# Altium PCB Rx_pcb.PcbDoc (part 2 of 2)
Units mm, origin at the board's own origin, x right, y up, seen from the top; angles counter-clockwise.
Board outline 77.98 x 77.98 mm, 4 copper layers (Top Layer, MidLayer1, MidLayer2, Bottom Layer); 173 components, 127 nets, 641 pads, 155 vias.
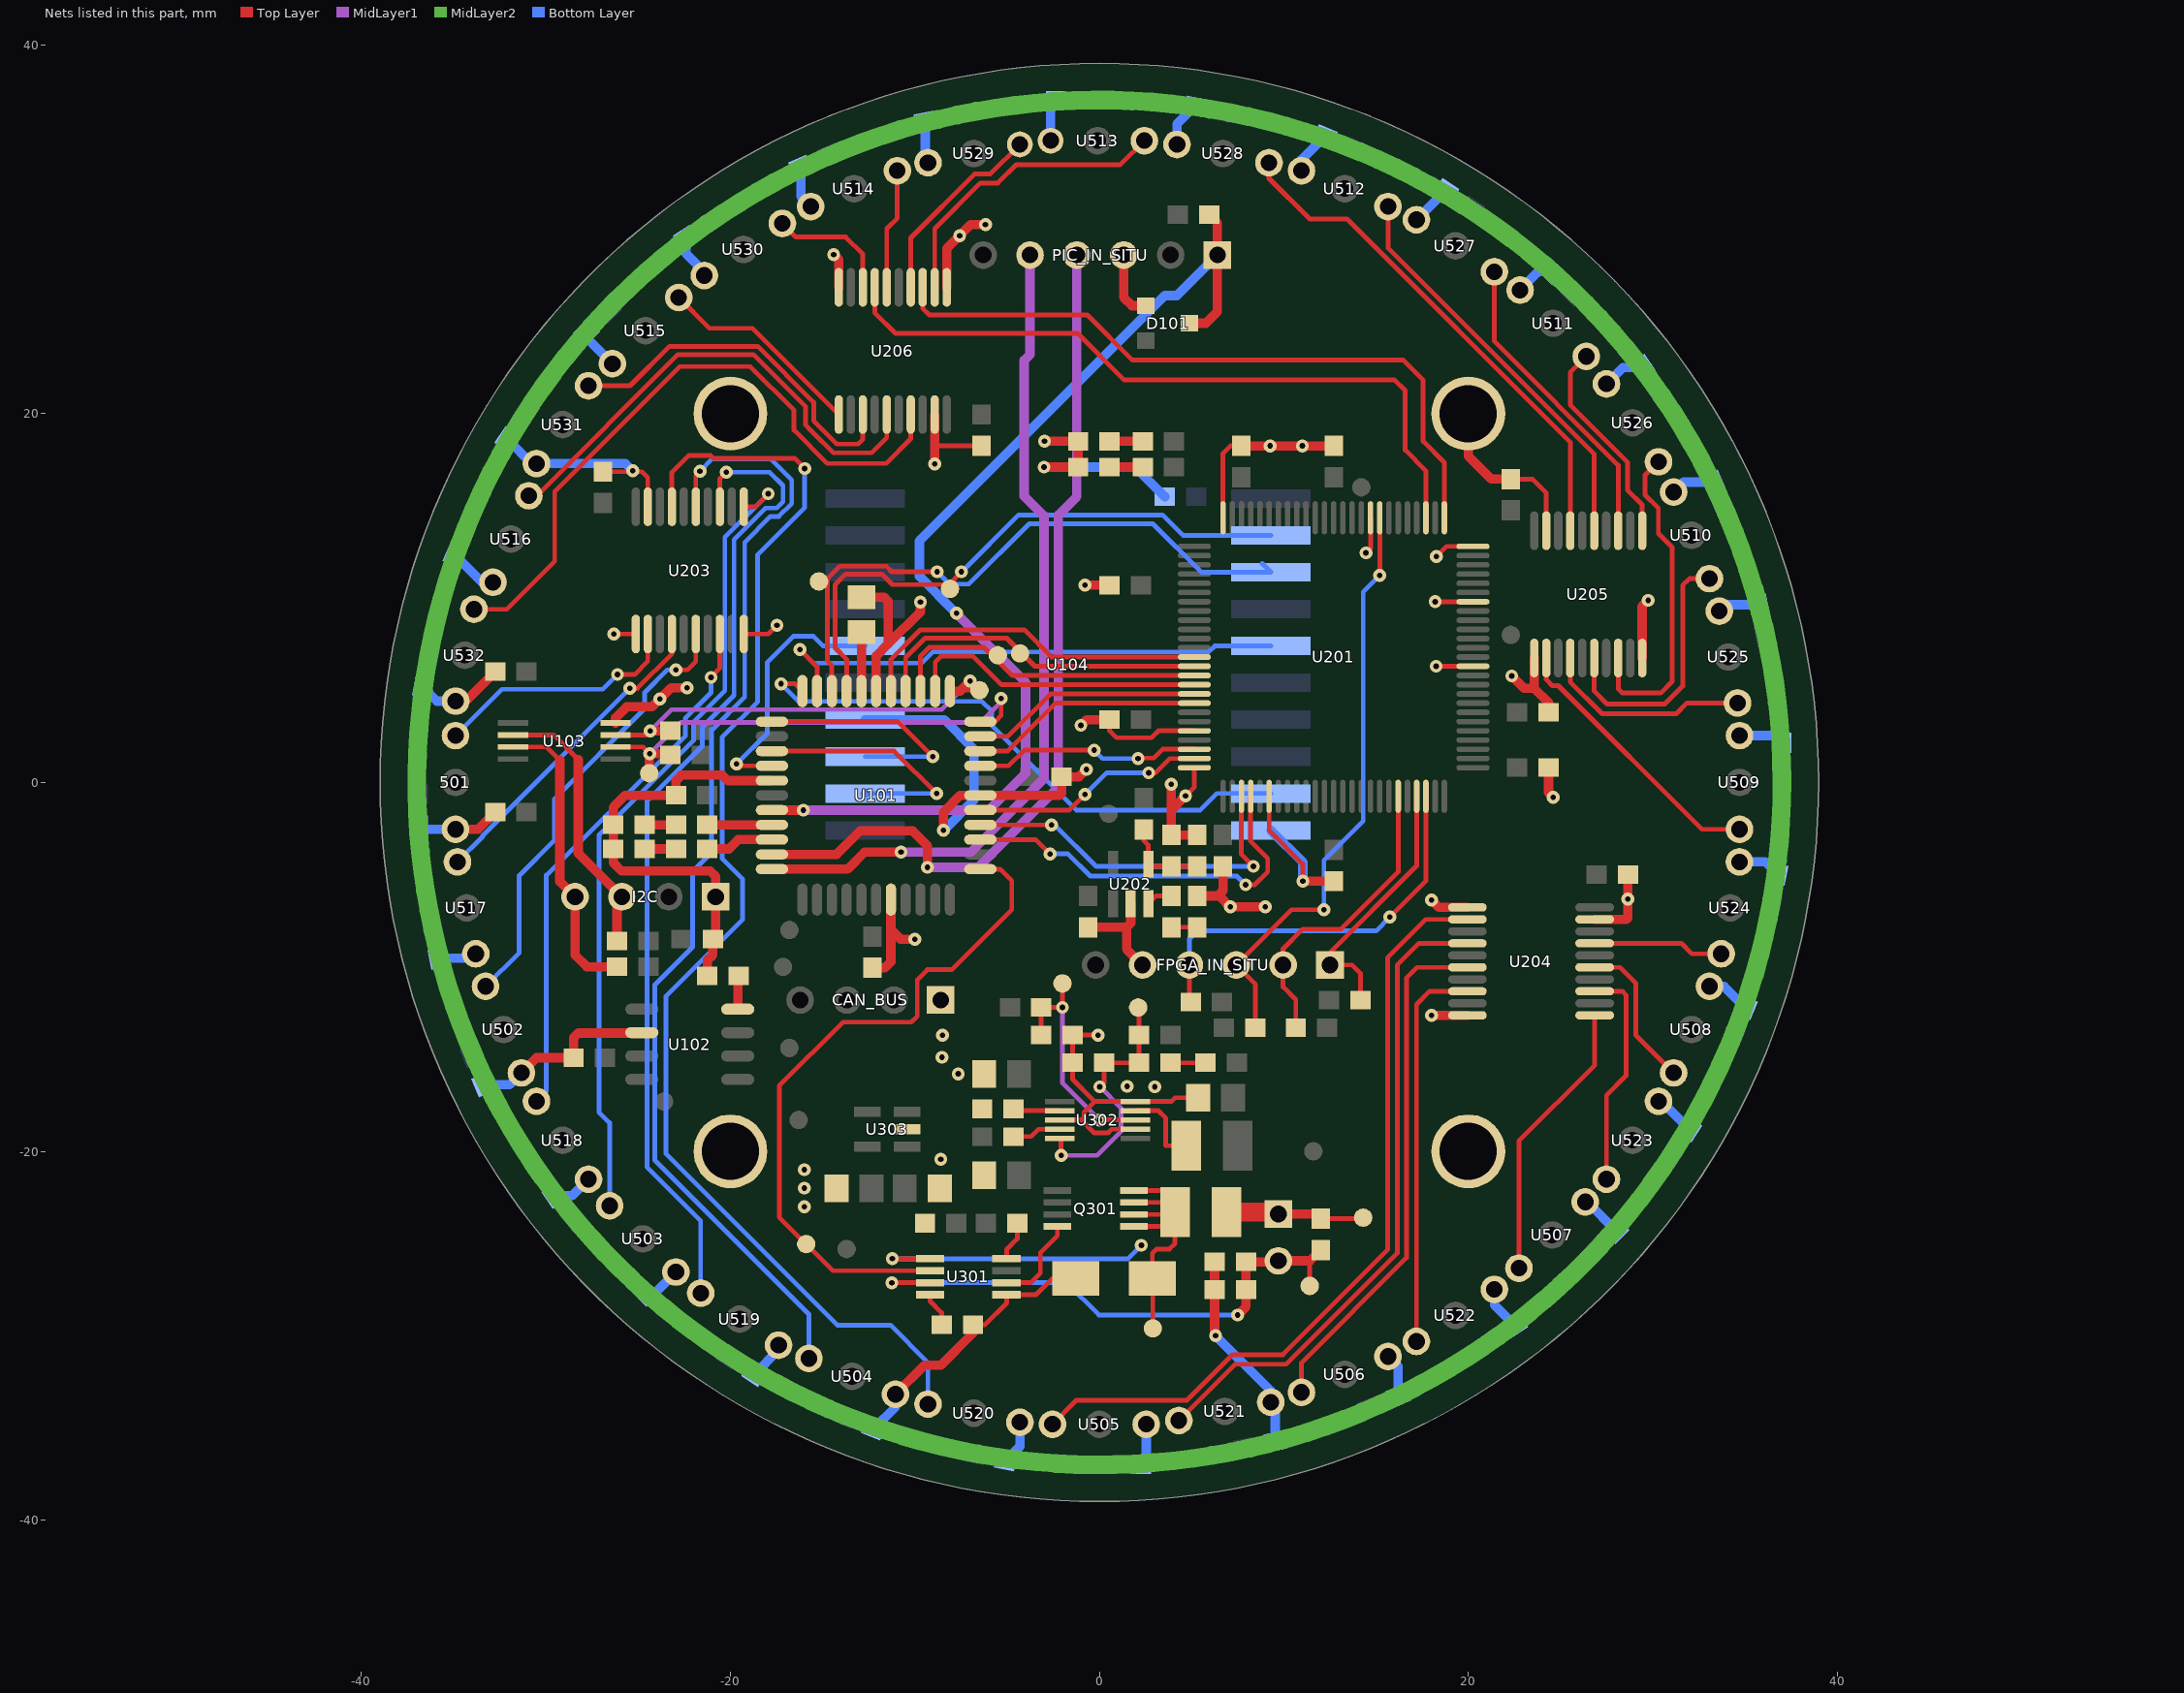
[diagram p4: the nets of this part, all layers, seen from the top]

## Via types
v1: diameter 0.7, hole 0.3, Top Layer to Bottom Layer, 155 vias

## Nets (pads, with @x,y where several pads share a name; then routed paths per layer and width w, separated by ;. In a path a pad name is that pad's centre, name@x,y a point inside that pad or via, vN(x,y) a via of type N, cw(c..) or ccw(c..) an arc to the next point about the centre after c; other vN are vias at no path point) (continued)
FPGA_TSOP40_15: U201.78 U206.7 | length 39.2
  Top Layer w0.254: U206.7@-12.175,26.85 -12.175,25.475 -11.05,24.35 -1.175,24.35 1.35,21.825 16,21.825 16.575,21.25 16.575,18.025 17.7,16.9 U201.78@17.7,14.35
FPGA_TSOP40_16: U201.76 U206.3 | length 37.8
  Top Layer w0.254: U206.3@-9.575,26.85 -9.575,25.7 -9.225,25.35 -0.65,25.35 1.8,22.9 16.475,22.9 17.55,21.825 17.55,18.5 18.7,17.35 U201.76@18.7,14.35
GND: 501.3 C101.2 C102.1 C103.1 C104.1 C105.1 C106.2 C107.1 C108.1 C109.2 C201.2 C202.2 C203.2 C204.2 C205.2 C206.1 C207.1 C208.1 C209.1 C210.1 C211.1 C212.1 C213.1 C214.1 C301.1 C302.1 C304.1 C305.1 C306.1 C307.1 C309.1 C310.1 C501.2 C502.2 C503.2 C504.2 C505.2 C506.2 C507.2 C508.2 C509.2 C510.2 C511.2 C512.2 C513.2 C514.2 C515.2 C516.2 C517.2 C518.2 C519.2 C520.2 C521.2 C522.2 C523.2 C524.2 C525.2 C526.2 C527.2 C528.2 C529.2 C530.2 C531.2 C532.2 CAN_BUS.1 D101.1 D301.1 FPGA_IN_SITU.5 I2C.1 pad.0 pad.1 pad.2 pad.3 PIC_IN_SITU.3 R102.1 R107.2 R108.2 R205.1 R208.1 R209.2 R210.2 R301.1 R303.1 R304.1 R309.1 U101.6 U101.16 U101.29 U101.39 U102.2 U103.4 U104.10 U104.14 U201.21 U201.25 U201.31 U201.62 U201.69 U201.75 U201.84 U201.100 U202.2 U203.1 U203.10 U203.19 U204.1 U204.10 U204.19 U205.1 U205.10 U205.19 U206.1 U206.10 U206.19 U301.5 U302.3 U302.7 U302.10 U303.2 U502.3 U503.3 U504.3 U505.3 U506.3 U507.3 U508.3 U509.3 U510.3 U511.3 U512.3 U513.3 U514.3 U515.3 U516.3 U517.3 U518.3 U519.3 U520.3 U521.3 U522.3 U523.3 U524.3 U525.3 U526.3 U527.3 U528.3 U529.3 U530.3 U531.3 U532.3 | length 548.3
  Top Layer w0.254: C201.2@-26.7,16.85 -24.8,16.85 -24.475,16.525 U203.19@-24.475,14.95 ; v1(-26.325,8.05) U203.1@-25.125,8.05 ; C107.1@-20.95,-8.5 C107.1@-20.8,-8.35 ; U203.10@-19.275,8.05 -17.95,8.05 v1(-17.475,8.525) ; -8.925,18.5 -8.675,18.25 C204.2@-6.4,18.25 ; R301.1@-6.85,-29.4 -6.2,-29.4 -5.025,-28.225 U301.5@-5.025,-27.775 -3.425,-27.775 -2.55,-26.9 D301.1@-1.275,-26.9 ; U302.3@-2.15,-18.3 -0.975,-18.3 ; R309.1@-1.45,-15.2 -1.45,-16.1 -0.25,-17.3 ; R309.1@-1.45,-15.2 C306.1@-1.45,-13.7 v1(-0.075,-13.7) ; C207.1@0.55,3.4 0.55,2.8 0.925,2.425 2.825,2.425 ; U302.7@1.95,-18.8 0.675,-18.8 0.475,-19 -0.275,-19 -0.975,-18.3 ; 2.919,2.519 2.825,2.425 ; 3.106,2.706 3.2,2.8 ; 3.9,-1.525 3.9,-1.5 ; v1(4.675,-0.725) 5.15,-0.25 U201.25@5.15,0.8 ; U201.21@5.15,2.8 3.2,2.8 ; C309.1@5.35,-17.1 4.1,-17.1 3.9,-17.3 U302.10@1.95,-17.3 -0.25,-17.3 ; v1@6.25,-29.95 v1(6.3,-30) ; 6.425,-6.15 6.5,-6.15 ; U201.100@6.7,14.35 6.7,17.85 7.1,18.25 C211.1@7.7,18.25 ; U201.31@9.2,-0.75 9.2,-2.6 11.025,-4.425 v1(11.025,-5.35) ; v1(14.45,12.45) 14.7,12.7 U201.84@14.7,14.35 ; v1(18.2,9.8) U201.69@20.25,9.8 ; v1(18.25,6.3) U201.62@20.25,6.3 ; v1(18.275,12.25) 18.825,12.8 U201.75@20.25,12.8 ; C203.2@22.3,16.45 23.475,16.45 24.225,15.7 U205.19@24.225,13.65 ; -0.975,-18.3 -0.825,-18.15 -0.825,-17.875 -0.25,-17.3 ; 2.825,2.425 3.2,2.8
  Top Layer w0.508: 501.3@-34.9,-2.54 -33.69,-2.54 C106.2@-32.75,-1.6 ; U532.3@-34.896,4.409 -34.341,4.409 C108.1@-32.75,6 ; U502.3@-31.328,-15.747 -30.506,-14.925 C101.2@-28.5,-14.925 -28.5,-13.85 -28.24,-13.59 U102.2@-24.75,-13.59 ; U103.4@-26.225,3.225 -26.225,3.5 -25.62,4.105 -24.245,4.105 v1(-23.825,4.525) -23.225,5.125 v1(-22.35,5.125) ; R102.1@-21.25,-10.5 -21.25,-9.65 -20.95,-9.35 C107.1@-20.95,-8.5 ; C107.1@-20.8,-8.35 I2C.1@-20.8,-6.2 -20.8,-5.1 -21.1,-4.8 -25.9,-4.8 -26.35,-4.35 R108.2@-26.35,-3.6 R107.2@-26.35,-2.3 -26.35,-1.35 -25.7,-0.7 C105.1@-22.95,-0.7 -22.95,0.1 -22.65,0.4 -20.45,0.4 -20.15,0.1 U101.16@-17.75,0.1 ; v1(-14.4,28.625) -14.125,28.35 U206.10@-14.125,26.85 ; C102.1@-12.9,10.05 -11.675,10.05 -11.45,9.825 -11.45,7.5 ; C103.1@-12.4,-10.05 C103.1@-12.3,-10.05 -11.625,-10.05 -11.3,-9.725 -11.3,-7.976 ; U101.6@-12.1,4.95 -12.1,6.85 -11.45,7.5 ; U101.29@-11.3,-6.35 -11.3,-7.976 ; U504.3@-11.053,-33.172 -9.481,-31.6 -8.6,-31.6 -6.85,-29.85 R301.1@-6.85,-29.4 ; v1(-10,-8.5) -10.776,-8.5 -11.3,-7.976 ; v1(-9.7,9.775) -9.7,9.25 -11.45,7.5 ; v1(-8.925,17.275) -8.925,18.5 U206.19@-8.925,19.95 ; v1(-8.45,-2.6) -8.45,-1.6 -7.55,-0.7 U101.39@-6.45,-0.7 -2.15,-0.7 -2.05,-0.6 C104.1@-2.05,0.1 ; U206.1@-8.275,26.85 -8.275,28.95 v1(-7.575,29.65) -6.975,30.25 v1(-6.175,30.25) ; v1@-3.025,17.125 v1(-3,17.1) R209.2@-1.15,17.1 R210.2@-1.15,18.5 v1(-2.975,18.5) ; C104.1@-2.05,0.3 -1.1,0.3 v1(-0.7,0.7) ; v1(-1,3.1) -0.7,3.4 C207.1@0.55,3.4 ; v1(-0.775,10.7) C212.1@0.55,10.7 ; C205.2@-0.6,-7.85 1.475,-7.85 ; PIC_IN_SITU.3@1.32,28.6 1.32,26.305 1.775,25.85 D101.1@2.525,25.85 ; U202.2@1.7,-6.575 1.7,-7.625 1.475,-7.85 ; FPGA_IN_SITU.5@2.34,-9.9 1.475,-9.035 1.475,-7.85 ; 3.9,-1.5 v1(4.675,-0.725) ; v1(3.9,-0.1) C206.1@3.9,-2.85 R208.1@5.3,-2.85 ; R205.1@5.3,-6.15 6.425,-6.15 6.7,-5.875 C213.1@6.7,-4.55 ; v1@6.25,-29.95 R303.1@6.25,-27.5 R304.1@6.25,-26 ; 6.5,-6.15 v1(7.1,-6.75) v1(9,-6.75) ; C211.1@7.7,18.25 C210.1@12.7,18.25 ; v1(11.025,-5.35) C208.1@12.7,-5.35 ; v1(18,-12.625) U204.10@19.95,-12.625 ; v1(18,-6.375) 18.4,-6.775 U204.1@19.95,-6.775 ; pad.2@20,20 20,17.7 21.25,16.45 C203.2@22.3,16.45 ; v1(22.35,5.775) 23.025,5.1 23.575,5.1 ; U205.1@23.575,6.75 23.575,5.1 ; C209.1@24.35,0.8 24.35,-0.55 v1(24.6,-0.8) ; C214.1@24.35,3.8 24.35,4.325 23.575,5.1 ; U204.19@26.85,-7.425 28.575,-7.425 28.65,-7.35 C202.2@28.65,-5 ; U205.10@29.425,6.75 29.425,9.55 v1(29.75,9.875)
  MidLayer2 w1.016: 37,0 cw(c0,0) 37,0.099
  Bottom Layer w0.508: C501.2@-36.9,-2.35 -36.71,-2.54 501.3@-34.9,-2.54 ; C532.2@-36.666,5.166 -35.908,4.409 U532.3@-34.896,4.409 ; C517.2@-35.834,-9.534 -34.047,-9.534 U517.3@-33.804,-9.291 ; C516.2@-34.925,12.315 -33.464,10.853 U516.3@-32.872,10.853 ; C502.2@-33.375,-16.385 -31.967,-16.385 U502.3@-31.328,-15.747 ; C531.2@-32.072,18.593 -30.767,17.288 U531.3@-30.511,17.288 -25.688,17.288 v1(-25.3,16.9) ; C518.2@-29.528,-22.407 -28.584,-22.407 U518.3@-27.689,-21.512 ; C515.2@-27.801,24.399 -27.801,24.109 U515.3@-26.396,22.704 ; C503.2@-24.599,-27.701 -24.109,-27.701 U503.3@-22.954,-26.546 ; C530.2@-22.407,29.528 -22.407,28.682 -21.412,27.687 U530.3@-21.412,27.489 ; C519.2@-18.693,-32.072 -17.388,-30.767 U519.3@-17.388,-30.511 ; C514.2@-16.185,33.375 -16.185,31.767 U514.3@-15.647,31.228 ; U104.14@-12.7,3.4 -8.4,3.4 -6.8,1.8 -6.8,-0.95 v1(-8.45,-2.6) ; C504.2@-12.215,-35.025 -11.053,-33.864 U504.3@-11.053,-33.172 ; C529.2@-9.434,35.834 -9.434,33.747 U529.3@-9.291,33.604 ; C520.2@-5.066,-36.766 -4.309,-36.008 U520.3@-4.309,-34.696 ; v1(-3,17.1) 1.95,17.1 C109.2@3.55,15.5 ; U513.3@-2.64,34.8 -2.64,36.71 C513.2@-2.35,37 ; C505.2@2.25,-37 2.54,-36.71 U505.3@2.54,-34.8 ; U528.3@4.209,34.596 4.209,35.708 C528.2@5.166,36.666 ; v1(6.3,-30) 9.291,-32.991 U521.3@9.291,-33.604 9.534,-33.847 C521.2@9.534,-35.734 ; U104.10@9.3,-2.6 11.025,-4.325 v1(11.025,-5.35) ; U512.3@10.953,33.172 10.953,33.764 C512.2@12.215,35.025 ; U506.3@15.647,-31.128 16.185,-31.667 C506.2@16.185,-33.275 ; U527.3@17.188,30.511 18.749,32.072 C527.2@18.793,32.072 ; U522.3@21.412,-27.489 21.412,-28.333 C522.2@22.507,-29.428 ; U511.3@22.804,26.696 23.809,27.701 C511.2@24.499,27.701 ; U507.3@26.337,-22.745 26.447,-22.745 C507.2@28.001,-24.299 ; U526.3@27.489,21.612 28.384,22.507 C526.2@29.428,22.507 ; U523.3@30.311,-17.288 30.467,-17.288 C523.2@31.972,-18.793 ; U510.3@31.128,15.747 31.667,16.285 C510.2@33.275,16.285 ; U508.3@33.072,-11.053 33.864,-11.053 C508.2@35.025,-12.215 ; U525.3@33.604,9.291 33.947,9.634 C525.2@35.734,9.634 ; U524.3@34.696,-4.309 36.108,-4.309 C524.2@36.766,-4.966 ; U509.3@34.7,2.54 36.61,2.54 C509.2@37,2.15
  other v1: -16,-23 -16,-22 -16,-21 -8.6,-20.425 3,-16.5 1.5,-16.475 -7.65,-15.8 -8.525,-14.9 -8.5,-13.7 28.65,-6.325 9.25,18.25 11,18.25
JTAG_TCK: FPGA_IN_SITU.4 R204.1 U201.48 | length 22.2
  Top Layer w0.254: FPGA_IN_SITU.4@4.88,-9.9 4.88,-11.83 R204.1@4.95,-11.9 ; v1(15.75,-7.3) 17.7,-5.35 U201.48@17.7,-0.75
  Bottom Layer w0.254: FPGA_IN_SITU.4@4.88,-9.9 4.88,-8.47 5.3,-8.05 15,-8.05 v1(15.75,-7.3)
JTAG_TDI: FPGA_IN_SITU.2 R202.1 U201.45 | length 16.6
  Top Layer w0.254: R202.1@10.65,-13.3 10.65,-11.775 9.96,-11.085 FPGA_IN_SITU.2@9.96,-9.9 9.96,-9.015 11.025,-7.95 13.1,-7.95 16.2,-4.85 U201.45@16.2,-0.75
JTAG_TDO: FPGA_IN_SITU.3 R203.1 U201.83 | length 32.3
  Top Layer w0.254: R203.1@8.45,-13.3 8.45,-10.93 FPGA_IN_SITU.3@7.42,-9.9 10.42,-6.9 v1(12.175,-6.9) ; v1(15.2,11.225) U201.83@15.2,14.35
  Bottom Layer w0.254: v1(12.175,-6.9) 12.175,-4.225 14.3,-2.1 14.3,10.325 v1(15.2,11.225)
JTAG_TMS: FPGA_IN_SITU.1 R201.1 U201.47 | length 14.5
  Top Layer w0.254: R201.1@14.15,-11.8 14.15,-10.35 13.7,-9.9 FPGA_IN_SITU.1@12.5,-9.9 12.302,-9.423 17.2,-4.525 U201.47@17.2,-0.75
NetC102_2: C102.2 U101.7 | length 3.2
  Top Layer w0.508: U101.7@-12.9,4.95 C102.2@-12.9,8.15
NetC206_2: C206.2 R207.1 R208.2 U202.4 | length 4.9
  Top Layer w0.254: R207.1@2.4,-2.35 2.4,-3.15 2.65,-3.4 U202.4@2.65,-4.425 2.775,-4.55 C206.2@3.9,-4.55 R208.2@5.3,-4.55
NetC303_1: C303.1 LED_VISION.2 PT17.1 R303.2 R304.2 U301.3 | length 30.3
  Top Layer w0.254: v1(-11.25,-27.125) U301.3@-9.175,-27.125 ; LED_VISION.2@9.64,-26 LED_VISION.2@9.7,-25.94 ; PT17.1@11.4,-27.3 11.4,-25.95 11.41,-25.94
  Top Layer w0.508: v1(7.5,-28.875) 7.95,-28.425 R303.2@7.95,-27.5 R304.2@7.95,-26 LED_VISION.2@9.64,-26 ; LED_VISION.2@9.7,-25.94 11.41,-25.94 C303.1@12,-25.35
  Bottom Layer w0.254: v1(-11.25,-27.125) -1.775,-27.125 -0.025,-28.875 v1(7.5,-28.875)
NetC303_2: C303.2 L301.2 LED_VISION.1 PT19.1 | length 7.6
  Top Layer w0.254: LED_VISION.1@9.6,-23.3 LED_VISION.1@9.7,-23.4 ; C303.2@11.75,-23.4 C303.2@12,-23.65 14.25,-23.65 PT19.1@14.3,-23.6
  Top Layer w0.508: LED_VISION.1@9.7,-23.4 C303.2@11.75,-23.4
  Top Layer w1.016: L301.2@6.9,-23.3 LED_VISION.1@9.6,-23.3
NetC306_2: C306.2 PT20.1 R305.1 U302.8 | length 12.8
  Top Layer w0.254: C306.2@-3.15,-13.7 R305.1@-3.15,-12.2 v1(-2,-12.2) PT20.1@-2,-10.9 ; v1(0,-18.3) U302.8@1.95,-18.3
  MidLayer1 w0.254: v1(-2,-12.2) -2,-16.3 v1(0,-18.3)
NetC307_2: C307.2 U302.2 | length 2.5
  Top Layer w0.254: C307.2@-4.65,-17.7 -4.55,-17.8 U302.2@-2.15,-17.8
NetC308_1: C308.1 PT23.1 R307.1 R309.2 U302.5 | length 14
  Top Layer w0.254: U302.5@-2.15,-19.3 -2.075,-19.375 v1(-2.075,-20.225) ; v1(0.025,-16.5) 0.25,-16.275 R309.2@0.25,-15.2 R307.1@2.15,-15.2 C308.1@2.15,-13.7 2.15,-12.25 PT23.1@2.1,-12.2
  MidLayer1 w0.254: v1(-2.075,-20.225) -0.125,-20.225 1.175,-18.925 1.175,-17.65 v1(0.025,-16.5)
NetD102_1: D102.1 U101.19 | length 3.5
  Top Layer w0.508: D102.1@-21.25,-2.3 U101.19@-17.75,-2.3
NetD102_2: D102.2 R107.1 | length 1.7
  Top Layer w0.508: R107.1@-24.65,-2.3 D102.2@-22.95,-2.3
NetD103_1: D103.1 U101.20 | length 3.7
  Top Layer w0.508: D103.1@-21.25,-3.6 -20.075,-3.6 -19.575,-3.1 U101.20@-17.75,-3.1
NetD103_2: D103.2 R108.1 | length 1.7
  Top Layer w0.508: R108.1@-24.65,-3.6 D103.2@-22.95,-3.6
NetD201_2: D201.2 R209.1 | length 1.8
  Top Layer w0.508: R209.1@0.55,17.1 D201.2@2.35,17.1
NetD202_2: D202.2 R210.1 | length 1.8
  Top Layer w0.508: R210.1@0.55,18.5 D202.2@2.35,18.5
NetL302_1: L302.1 U302.9 | length 4.4
  Top Layer w0.254: U302.9@1.95,-17.8 3.2,-17.8 3.6,-18.2 3.6,-19.7 L302.1@4.7,-19.7
NetQ301_4: Q301.4 U301.6 | length 5
  Top Layer w0.254: U301.6@-5.025,-27.125 -3.725,-27.125 -3.2,-26.6 -3.2,-25.5 -2.275,-24.575 Q301.4@-2.275,-24.075
NetR102_2: R102.2 U102.8 | length 1.8
  Top Layer w0.254: R102.2@-19.6,-10.55 R102.2@-19.55,-10.5
  Top Layer w0.508: U102.8@-19.6,-12.295 R102.2@-19.6,-10.55
NetR205_2: R205.2 R206.1 | length 1.4
  Top Layer w0.254: R206.1@3.9,-7.85 R205.2@5.3,-7.85
NetR206_2: R206.2 U202.3 | length 1.4
  Top Layer w0.254: U202.3@2.65,-6.575 3.075,-6.15 R206.2@3.9,-6.15
NetR301_2: R301.2 U301.4 | length 1.9
  Top Layer w0.254: U301.4@-9.175,-27.775 -9.175,-28.125 -8.55,-28.75 R301.2@-8.55,-29.4
NetR302_1: R302.1 U301.8 | length 2.2
  Top Layer w0.254: U301.8@-5.025,-25.825 -5.025,-25.325 -4.45,-24.75 R302.1@-4.45,-23.9
NetR306_1: R306.1 U302.4 | length 2.7
  Top Layer w0.254: R306.1@-4.65,-19.2 -3.7,-19.2 -3.3,-18.8 U302.4@-2.15,-18.8
NetR307_2: R307.2 R308.1 | length 1.9
  Top Layer w0.254: R307.2@3.85,-15.2 R308.1@5.75,-15.2
PIC_CPLD_PORT0: U101.5 U201.13 | length 19.4
  Top Layer w0.254: U101.5@-11.3,4.95 -11.3,6.675 -9.7,8.275 -4.075,8.275 -2.6,6.8 U201.13@5.15,6.8
PIC_CPLD_PORT1: PT11.1 U101.4 U201.14 | length 18.5
  Top Layer w0.254: U101.4@-10.5,4.95 -10.5,6.775 -9.45,7.825 -5.025,7.825 -3.5,6.3 U201.14@5.15,6.3
PIC_CPLD_PORT2: PT12.1 U101.3 U201.15 | length 17.6
  Top Layer w0.254: U101.3@-9.7,4.95 -9.7,6.85 -9.225,7.325 -6.25,7.325 -4.725,5.8 U201.15@5.15,5.8
PIC_CPLD_PORT3: U101.2 U201.16 | length 16.4
  Top Layer w0.254: U101.2@-8.9,4.95 -8.9,6.525 -8.575,6.85 -6.85,6.85 -5.3,5.3 U201.16@5.15,5.3
PIC_CPLD_PORT4: U101.43 U201.17 | length 12.6
  Top Layer w0.254: U101.43@-6.45,2.5 -4.95,2.5 -2.65,4.8 U201.17@5.15,4.8
PIC_CPLD_PORT5: U101.42 U201.18 | length 12.7
  Top Layer w0.254: U101.42@-6.45,1.7 -4.975,1.7 -2.375,4.3 U201.18@5.15,4.3
PIC_CPLD_PORT6: U101.41 U201.23 | length 12.4
  Top Layer w0.254: U101.41@-6.45,0.9 -4.925,0.9 -4.075,1.75 v1(-0.275,1.75) ; v1@2.025,1.325 2.95,1.325 3.425,1.8 U201.23@5.15,1.8
  Bottom Layer w0.254: v1(-0.275,1.75) 0.175,1.3 v1(2.1,1.3)
PIC_CPLD_PORT7: U101.38 U201.24 | length 12.8
  Top Layer w0.254: U101.38@-6.45,-1.5 -1.625,-1.5 v1(-0.775,-0.65) ; v1(2.675,0.525) 3.05,0.525 3.825,1.3 U201.24@5.15,1.3
  Bottom Layer w0.254: v1(-0.775,-0.65) 0.4,0.525 v1(2.675,0.525)
PIC_CPLD_PORT8: U101.37 U201.28 | length 19.8
  Top Layer w0.254: U101.37@-6.45,-2.3 v1(-2.6,-2.3) ; U201.28@7.7,-0.75 7.7,-3.9 v1(8.35,-4.55)
  Bottom Layer w0.254: v1(-2.6,-2.3) -2.425,-2.3 -0.175,-4.55 v1(8.35,-4.55)
PIC_CPLD_PORT9: U101.36 U201.29 | length 21.4
  Top Layer w0.254: U101.36@-6.45,-3.1 -3.45,-3.1 v1(-2.675,-3.875) ; v1(7.925,-5.55) 8.425,-5.55 9.125,-4.85 9.125,-4.125 8.2,-3.2 U201.29@8.2,-0.75
  Bottom Layer w0.254: v1(-2.675,-3.875) -1.7,-3.875 -0.5,-5.075 7.45,-5.075 v1(7.925,-5.55)
PIC_INSITU_PGC: PIC_IN_SITU.5 U101.22 | length 45.8
  Top Layer w0.508: U101.22@-17.75,-4.7 -13.65,-4.7 -12.725,-3.775 v1(-10.75,-3.775)
  MidLayer1 w0.508: v1(-10.75,-3.775) -6.975,-3.775 -3,0.2 -3,14.45 -4.075,15.525 -4.075,22.885 -3.76,23.2 PIC_IN_SITU.5@-3.76,28.6
PIC_INSITU_PGD: PIC_IN_SITU.4 U101.21 | length 48.6
  Top Layer w0.508: U101.21@-17.75,-3.9 -14.25,-3.9 -12.975,-2.625 -10.125,-2.625 -9.325,-3.425 v1(-9.325,-4.6)
  MidLayer1 w0.508: v1(-9.325,-4.6) -6.575,-4.6 -2.225,-0.25 -2.225,14.5 -1.22,15.505 PIC_IN_SITU.4@-1.22,28.6
PIC_RESET: D101.3 PIC_IN_SITU.1 R101.1 U101.18 | length 60
  Top Layer w0.508: U101.18@-17.75,-1.5 v1(-16.05,-1.5) ; D101.3@4.875,24.9 5.775,24.9 6.4,25.525 PIC_IN_SITU.1@6.4,28.6 6.4,30.35 R101.1@5.95,30.8
  MidLayer1 w0.508: v1(-16.05,-1.5) -6,-1.5 -4,0.5 -4,5.425 v1(-7.75,9.175)
  Bottom Layer w0.508: v1(-7.75,9.175) -9.75,11.175 -9.75,13.1 3.55,26.4 4.2,26.4 PIC_IN_SITU.1@6.4,28.6 ; PIC_IN_SITU.1@5.925,28.6 PIC_IN_SITU.1@6.4,29.075
PIC_SCL: PT8.1 R103.1 U101.44 U103.2 | length 26.8
  Top Layer w0.254: U103.2@-26.225,1.925 -24.735,1.925 v1(-24.375,1.565) ; R103.1@-23.315,1.565 R103.1@-23.25,1.5 ; U101.44@-6.45,3.3 -5.65,3.3 -5.325,3.625 v1(-5.325,4.55)
  Top Layer w0.508: PT8.1@-24.4,0.5 -24.4,1.54 v1(-24.375,1.565) R103.1@-23.315,1.565
  MidLayer1 w0.254: v1(-24.375,1.565) -22.69,3.25 -6.45,3.25 -5.325,4.375 v1(-5.325,4.55)
PIC_SDA: PT7.1 R104.1 U101.1 U103.3 | length 23.9
  Top Layer w0.254: U103.3@-26.225,2.575 -24.575,2.575 v1(-24.35,2.8) ; -7.55,4.95 -7.5,5 PT7.1@-6.5,5
  Top Layer w0.508: v1(-24.35,2.8) R104.1@-23.25,2.8 ; U101.1@-8.1,4.95 -7.55,4.95 v1(-7,5.5)
  MidLayer1 w0.254: v1(-24.35,2.8) -23.2,3.95 -8.55,3.95 v1(-7,5.5)
RX_I2C_SCL: I2C.4 R105.1 U103.7 | length 16.3
  Top Layer w0.254: U103.7@-31.775,1.925 -29.96,1.925 -29.25,1.215
  Top Layer w0.508: -29.25,1.215 -29.25,-5.37 I2C.4@-28.42,-6.2 -28.42,-9.355 -27.775,-10 R105.1@-26.15,-10
RX_I2C_SDA: I2C.3 R106.1 U103.6 | length 15
  Top Layer w0.254: U103.6@-31.775,2.575 -29.575,2.575 -28.25,1.25
  Top Layer w0.508: -28.25,1.25 -28.25,-3.83 I2C.3@-25.88,-6.2 -26.15,-6.47 R106.1@-26.15,-8.6
TSOP33_1: 501.1 U203.2 | length 13.6
  Top Layer w0.254: v1(-26.125,5.85) -25.2,5.85 -24.475,6.575 U203.2@-24.475,8.05
  Bottom Layer w0.254: 501.1@-34.9,2.54 -32.39,5.05 -27.2,5.05 -26.925,5.05 v1(-26.125,5.85)
TSOP33_2: U203.6 U502.1 | length 24.5
  Top Layer w0.254: v1(-22.95,6.1) -22.325,6.1 -21.875,6.55 U203.6@-21.875,8.05
  Bottom Layer w0.254: U502.1@-33.272,-11.053 -31.45,-9.231 -31.45,-5.05 -29.55,-3.15 -29.55,-0.9 -24.65,4 -24.65,4.875 -23.425,6.1 v1(-22.95,6.1)
TSOP33_3: U203.11 U503.1 | length 44.3
  Top Layer w0.254: U203.11@-19.275,14.95 -18.65,14.95 v1(-17.95,15.65)
  Bottom Layer w0.254: U503.1@-26.546,-22.954 -26.546,-18.454 -27.125,-17.875 -27.125,-2.85 -22,2.275 -22,3.275 -20.3,4.975 -20.3,13.3 v1(-17.95,15.65)
TSOP33_4: U203.15 U504.1 | length 62.2
  Top Layer w0.254: U203.15@-21.875,14.95 -21.875,16.65 v1(-21.65,16.875)
  Bottom Layer w0.254: v1(-21.65,16.875) -20.975,17.55 -17.825,17.55 -16.675,16.4 -16.675,15.125 -17.375,14.425 -17.825,14.425 -19.225,13.025 -19.225,4.625 -21.025,2.825 -21.025,-3.8 -22.05,-4.825 -22.05,-8.925 -24.1,-10.975 -24.1,-20.475 -15.747,-28.828 U504.1@-15.747,-31.228
TSOP33_5: U204.2 U505.1 | length 43.1
  Top Layer w0.254: U505.1@-2.54,-34.8 -1.24,-33.5 4.75,-33.5 7.22,-31.03 9.945,-31.03 15.625,-25.35 15.625,-9.5 17.7,-7.425 U204.2@19.95,-7.425
TSOP33_6: U204.6 U506.1 | length 28.4
  Top Layer w0.254: U506.1@10.953,-33.072 10.953,-31.472 16.65,-25.775 16.65,-10.6 17.225,-10.025 U204.6@19.95,-10.025
TSOP33_7: U204.11 U507.1 | length 15.4
  Top Layer w0.254: U507.1@22.745,-26.337 22.745,-19.43 26.85,-15.325 U204.11@26.85,-12.625
TSOP33_8: U204.15 U508.1 | length 8.3
  Top Layer w0.254: U204.15@26.85,-10.025 28.225,-10.025 29.075,-10.875 29.075,-13.694 U508.1@31.128,-15.747
TSOP33_9: U205.2 U509.1 | length 15
  Top Layer w0.254: U205.2@24.225,6.75 24.225,5.575 24.55,5.25 24.875,5.25 32.665,-2.54 U509.1@34.7,-2.54
TSOP33_10: U205.6 U510.1 | length 14.4
  Top Layer w0.254: U205.6@26.825,6.75 26.825,4.95 27.525,4.25 30.65,4.25 31.625,5.225 31.625,10.7 31.978,11.053 U510.1@33.072,11.053
TSOP33_11: U205.11 U511.1 | length 11.4
  Top Layer w0.254: U511.1@26.396,23.104 25.525,22.233 25.525,20.475 28.625,17.375 28.625,15.85 29.425,15.05 U205.11@29.425,13.65
TSOP33_12: U205.15 U512.1 | length 22.2
  Top Layer w0.254: U512.1@15.647,31.228 15.647,28.978 26.825,17.8 U205.15@26.825,13.65
TSOP33_13: U206.2 U513.1 | length 16.5
  Top Layer w0.254: U206.2@-8.925,26.85 -8.925,30.025 -6.45,32.5 -5.5,32.5 -4.5,33.5 1.14,33.5 U513.1@2.44,34.8
TSOP33_14: U206.6 U514.1 | length 6.6
  Top Layer w0.254: U206.6@-11.525,26.85 -11.525,30.025 -10.953,30.597 U514.1@-10.953,33.172
TSOP33_15: U206.11 U515.1 | length 11.3
  Top Layer w0.254: U515.1@-22.804,26.296 -21.133,24.625 -18.8,24.625 U206.11@-14.125,19.95
TSOP33_16: U206.15 U516.1 | length 27
  Top Layer w0.254: U516.1@-30.928,15.547 -30.503,15.547 -22.85,23.2 -18.75,23.2 -15.925,20.375 -15.925,19.375 -15.613,19.063 -14.425,17.875 -12.35,17.875 -11.525,18.7 U206.15@-11.525,19.95
TSOP40_1: U203.4 U517.1 | length 17.4
  Top Layer w0.254: v1(-25.45,5.1) -25.05,5.1 -23.175,6.975 U203.4@-23.175,8.05
  Bottom Layer w0.254: U517.1@-34.796,-4.309 -33.425,-2.938 -33.425,-2.875 v1(-25.45,5.1)
TSOP40_2: U203.8 U518.1 | length 29.5
  Top Layer w0.254: v1@-21.075,5.7 -20.575,6.2 U203.8@-20.575,8.05
  Bottom Layer w0.254: U518.1@-30.511,-17.288 -29.975,-16.752 -29.975,-5.025 -22.45,2.5 -22.45,3.475 -21.05,4.875 v1(-21.05,5.7)
TSOP40_3: U203.13 U519.1 | length 53.8
  Top Layer w0.254: U203.13@-20.575,14.95 -20.575,16.475 v1(-20.225,16.825)
  Bottom Layer w0.254: U519.1@-21.612,-27.689 -21.612,-23.763 -24.525,-20.85 -24.525,-1.025 -21.525,1.975 -21.525,3 -19.8,4.725 -19.8,13.175 -18.1,14.875 -17.5,14.875 -17.15,15.225 -17.15,16.1 -17.875,16.825 v1(-20.225,16.825)
TSOP40_4: U203.17 U520.1 | length 72.1
  Top Layer w0.254: U203.17@-23.175,14.95 -23.175,16.825 -22.275,17.725 -21.075,17.725 -20.925,17.575 -16.525,17.575 v1(-15.975,17.025)
  Bottom Layer w0.254: v1(-15.975,17.025) -15.975,14.9 -18.525,12.35 -18.525,4.375 -20.45,2.45 -20.45,-4.125 -19.35,-5.225 -19.35,-7.45 -23.5,-11.6 -23.5,-20.125 -14.2,-29.425 -11.325,-29.425 -9.291,-31.459 U520.1@-9.291,-33.704
TSOP40_5: U204.4 U521.1 | length 35.5
  Top Layer w0.254: U521.1@4.309,-34.596 7.354,-31.55 10.125,-31.55 16.15,-25.525 16.15,-9.9 17.325,-8.725 U204.4@19.95,-8.725
TSOP40_6: U204.8 U522.1 | length 21.3
  Top Layer w0.254: U522.1@17.188,-30.311 17.188,-12.037 17.9,-11.325 U204.8@19.95,-11.325
TSOP40_7: U204.13 U523.1 | length 12.2
  Top Layer w0.254: U204.13@26.85,-11.325 28.35,-11.325 28.55,-11.525 28.55,-15.9 27.489,-16.961 U523.1@27.489,-21.512
TSOP40_8: U204.17 U524.1 | length 7.1
  Top Layer w0.254: U204.17@26.85,-8.725 31.55,-8.725 32.116,-9.291 U524.1@33.704,-9.291
TSOP40_9: U205.4 U525.1 | length 11.3
  Top Layer w0.254: U205.4@25.525,6.75 25.525,5.45 27.25,3.725 31.275,3.725 31.859,4.309 U525.1@34.596,4.309
TSOP40_10: U205.8 U526.1 | length 17.8
  Top Layer w0.254: U205.8@28.125,6.75 28.125,5.075 28.35,4.85 30.425,4.85 31.05,5.475 31.05,12.75 30.3,13.5 30.3,14.875 29.575,15.6 29.575,16.652 U526.1@30.311,17.388
TSOP40_11: U205.13 U527.1 | length 16.8
  Top Layer w0.254: U527.1@21.412,27.689 21.412,23.913 28.125,17.2 U205.13@28.125,13.65
TSOP40_12: U205.17 U528.1 | length 27.9
  Top Layer w0.254: U528.1@9.191,33.604 9.191,32.759 11.4,30.55 13.425,30.55 25.525,18.45 U205.17@25.525,13.65
TSOP40_13: U206.4 U529.1 | length 10.7
  Top Layer w0.254: U206.4@-10.225,26.85 -10.225,29.525 -6.75,33 -5.904,33 U529.1@-4.309,34.596
TSOP40_14: U206.8 U530.1 | length 6.9
  Top Layer w0.254: U530.1@-17.188,30.311 -16.452,29.575 -13.75,29.575 -12.825,28.65 U206.8@-12.825,26.85
TSOP40_15: U206.13 U531.1 | length 20
  Top Layer w0.254: U531.1@-27.689,21.512 -25.438,21.512 -23.3,23.65 -18.525,23.65 -15.487,20.612 -15.487,19.612 -14.225,18.35 -13.075,18.35 -12.825,18.6 U206.13@-12.825,19.95
TSOP40_16: U206.17 U532.1 | length 36
  Top Layer w0.254: U532.1@-33.904,9.391 -32.134,9.391 -29.525,12 -29.525,15.775 -22.75,22.55 -18.925,22.55 -16.55,20.175 -16.55,19.1 -14.75,17.3 -11.55,17.3 -10.225,18.625 U206.17@-10.225,19.95
VISION_ENABLE: PT16.1 U101.34 U301.2 | length 37.7
  Top Layer w0.254: U301.2@-9.175,-26.475 -13.15,-26.475 -14.45,-26.475 -17.35,-23.575 -17.35,-16.45 -13.9,-13 -10.2,-13 -9.875,-12.675 -9.875,-10.7 -9.325,-10.15 -8,-10.15 -4.75,-6.9 -4.75,-5.325 -5.375,-4.7 U101.34@-6.45,-4.7
VLX_LED: D301.2 L301.1 PT18.1 Q301.5 Q301.6 Q301.7 Q301.8 U301.1 | length 32.3
  Top Layer w0.254: v1(-11.225,-25.825) U301.1@-9.175,-25.825 ; Q301.5@1.875,-24.075 4.075,-24.075 L301.1@4.1,-24.1 ; Q301.6@1.875,-23.425 3.975,-23.425 L301.1@4.1,-23.3 ; Q301.7@1.875,-22.775 L301.1@3.575,-22.775 ; Q301.8@1.875,-22.125 3.425,-22.125 3.575,-22.275 L301.1@3.575,-22.775 ; PT18.1@2.9,-29.6 2.9,-26.925 D301.2@2.875,-26.9 2.875,-25.525 3.1,-25.3 3.8,-25.3 4.1,-25 L301.1@4.1,-24.1 ; L301.1@3.575,-22.775 L301.1@4.1,-23.3 ; L301.1@4.1,-24.1 L301.1@4.1,-23.3
  Bottom Layer w0.254: v1(-11.225,-25.825) 1.55,-25.825 v1(2.275,-25.1)
XBEE_C\T\C\: U101.14 U104.12 | length 13.8
  Top Layer w0.254: U101.14@-17.75,1.7 -11.125,1.7 v1(-8.825,-0.6)
  Bottom Layer w0.254: U104.12@-12.7,-0.6 v1(-8.825,-0.6)
XBEE_DIN: PT5.1 U101.8 U104.2 | length 32.1
  Top Layer w0.254: U101.8@-13.7,4.95 -13.7,6.675 -14.325,7.3 -14.325,10.725 -13.755,11.295 -11.795,11.295 -11.225,10.725 -8.15,10.725 v1@-7.5,11.375
  Bottom Layer w0.254: v1(-7.475,11.425) -7.45,11.425 -4.375,14.5 3.425,14.5 4.525,13.4 U104.2@9.3,13.4
XBEE_DOUT: PT6.1 U101.9 U104.3 | length 34
  Top Layer w0.254: U101.9@-14.5,4.95 -14.5,6.35 -14.75,6.6 -14.75,11.05 -14.075,11.725 -11.55,11.725 -11.25,11.425 v1(-8.8,11.425)
  Bottom Layer w0.254: v1(-8.8,11.425) -8.125,10.75 -7.075,10.75 -3.8,14.025 2.9,14.025 5.525,11.4 U104.3@9.3,11.4 U104.3@8.83,11.87
XBEE_DTR: U101.11 U104.9 | length 31.5
  Top Layer w0.254: v1(-17.25,5.35) -16.5,5.35 U101.11@-16.1,4.95
  Bottom Layer w0.254: v1(-17.25,5.35) -16.3,4.4 -6.371,4.4 -5.835,3.865 -5.835,3.085 -1.25,-1.5 5.475,-1.5 6.375,-0.6 U104.9@9.3,-0.6
XBEE_ON/S\L\E\E\P\: U101.12 U104.13 | length 13.2
  Top Layer w0.254: U101.12@-17.75,3.3 -10.925,3.3 v1(-9.025,1.4)
  Bottom Layer w0.254: U104.13@-12.7,1.4 v1(-9.025,1.4)
XBEE_R\E\S\E\T\: U101.10 U104.5 | length 28.8
  Top Layer w0.254: v1(-16.225,7.2) -15.3,6.275 U101.10@-15.3,4.95
  Bottom Layer w0.254: v1(-16.225,7.2) -15.5,6.475 -9.625,6.475 -9.025,7.075 5.925,7.075 6.25,7.4 U104.5@9.3,7.4
XBEE_R\T\S\: U101.15 U104.16 | length 14.3
  Top Layer w0.254: v1@-19.575,0.9 U101.15@-17.75,0.9
  Top Layer w0.508: v1(-19.675,1) v1@-19.575,0.9
  Bottom Layer w0.254: v1(-19.675,1) -18,2.675 -18,6.525 -16.6,7.925 -15.5,7.925 -14.975,7.4 U104.16@-12.7,7.4
pads on no net: D101.2 PIC_IN_SITU.6 U101.13 U101.25 U101.26 U101.27 U101.30 U101.31 U101.32 U101.33 U101.35 U102.5 U103.1 U104.4 U104.6 U104.7 U104.8 U104.11 U104.15 U104.17 U104.18 U104.19 U104.20 U201.4 U201.10 U201.12 U201.19 U201.27 U201.30 U201.32 U201.33 U201.34 U201.35 U201.36 U201.37 U201.39 U201.44 U201.46 U201.52 U201.55 U201.56 U201.58 U201.59 U201.60 U201.61 U201.63 U201.64 U201.65 U201.86 U201.87 U201.89 U201.90 U201.91 U201.92 U201.95 U201.96 U201.97 U201.99 U303.4
copper on no net: | length 158
  Top Layer w0.254: 0,-30 0,-33 ; 0,30 0,33 ; 10,24.85 10,27.125 ; 12,24.85 12,27.125 ; 14,24.85 14,27.125 ; 0,-33 1,-32 -1,-32 0,-33 ; 0,33 1,32 -1,32 0,33 ; 8,24.85 16,24.85 16,27.125 8,27.125 8,24.85
  MidLayer1 w0.254: 10,24.85 10,27.1 ; 12,24.85 12,27.1 ; 14,24.85 14,27.1 ; 8,24.85 16,24.85 16,27.1 8,27.1 8,24.85
  MidLayer2 w0.254: 10,24.85 10,27.1 ; 12,24.85 12,27.1 ; 14,24.85 14,27.1 ; 8,24.85 16,24.85 16,27.1 8,27.1 8,24.85
  Bottom Layer w0.254: 0,-30 0,-33 ; 0,30 0,32 ; 10,24.875 10,27.1 ; 11.5,-27 14,-27 14,-26.5 14,-25 ; 11.5,-22 14,-22 14,-23.5 ; 12,24.875 12,27.1 ; 12.5,-25 15.5,-25 ; 14,24.875 14,27.1 ; 0,-33 1,-32 -1,-32 0,-33 ; 14,-25 15.5,-23.5 12.5,-23.5 14,-25 ; -1,32 0,33 1,32 -1,32 ; 8,24.875 15.975,24.875 15.975,27.075 15.95,27.1 8,27.1 8,24.875

## Polygon pours and split planes (outlines as drawn)
+1.8V on Top Layer "Top Layer-No Net" (solid, remove dead copper, pour order 1001): -15.5,-19.5 -15,-20 -11.9,-20 -11.9,-18.8 -12.2,-18.5 -13.5,-18.5 -13.7,-18.3 -13.7,-17.3 -15,-16 -15.5,-16.5 -15.5,-19.5
+3.3V on Top Layer "Top Layer-No Net" (solid, remove dead copper, pour order 1002): 6.3,-21.3 6.3,-16.1 6.5,-15.9 6.6,-15.9 6.6,-14.4 6.7,-14.3 6.8,-14.3 10,-14.3 10.5,-14.8 10.5,-19.6 10.5,-21 10,-21.5 7,-21.5 6.5,-21.5 6.3,-21.3
+5V on Top Layer "Top Layer-No Net" (solid, remove dead copper, pour order 1000): -14.5,-16 -12.3,-18.2 -9.6,-18.2 -8.9,-17.5 -8.8,-17.4 -8.8,-16.1 -9.6,-15.3 -11.5,-13.4 -12.9,-13.4 -14.5,-15 -14.5,-16
+1.8V on MidLayer1 "Top Layer-No Net" (solid, remove dead copper, pour order 1003): 12,4.5 18.5,4.5 19,4 19,3.5 18.5,3 12,3 5.5,-3.5 0.5,-8.5 -3,-8.5 -4,-7.5 -4,-6.5 -4,-6.3 0.8,-1.5 1,-1.3 5,-1.3 7,0.7 10.8,4.5 12,4.5
+5V on MidLayer1 "Top Layer-No Net" (solid, remove dead copper, pour order 1002): -12.5,-11 -12,-10.5 -6.5,-10.5 -3.5,-10.5 -3,-11 -3,-18 -3.5,-18.5 -12,-18.5 -14.5,-16 -14.5,-15 -12.5,-13 -12.5,-11
+3.3V on MidLayer1 "Top Layer-No Net" (solid, remove dead copper, pour order 1003): 6,-21 6.5,-21.5 17,-21.5 17.5,-21 17.5,-14 17,-13.5 6.5,-13.5 6,-14 6,-21
+3.3V on MidLayer1 "Top Layer-No Net" (solid, remove dead copper, pour order 1002): 11,10 14,10 15,9 15,6 14,5 11,5 10,6 10,8.9 11,9.9 11,10
+3.3V on MidLayer1 "Top Layer-No Net" (solid, remove dead copper, pour order 1001): 8.5,17.5 8,17 8,16.5 8.5,16 8.8,15.7 10,14.5 19,14.5 19.9,13.6 21,14.7 21,16 19.5,17.5 8.5,17.5
+3.3V on MidLayer1 "Top Layer-No Net" (solid, remove dead copper, pour order 1000): -33,-4.5 -33,4.5 -29.5,8 -29.5,13.5 -28,15 -26,15 -24,13 -24,11 -25,10 -27,10 -27.5,9.5 -27.5,7.5 -27.5,7.4 -26.8,6.7 -26.8,0.8 -26.8,-4.3 -27.5,-5 -32,-5 -32.5,-5 -33,-4.5
GND on MidLayer2 "Top Layer-No Net" (solid, remove dead copper, pour order 1004): -36.8,7 -36.8,-7.2 -35.6,-8.4 -35.5,-8.5 -35.5,-12 -35.5,-12.2 -33.7,-14 -33.5,-14.2 -33.5,-16.8 -33.5,-16.9 -30.9,-19.5 -30.8,-19.6 -30.8,-21.3 -30.4,-21.3 -19.9,-31.8 -19.5,-32.2 -17.3,-32.2 -17.2,-32.2 -15.1,-34.3 -14.9,-34.5 -11.9,-34.5 -11.7,-34.5 -10,-36.2 -9.8,-36 -6.3,-36 -5.3,-37 -4.8,-36.5 8.4,-36.5 8.6,-36.5 9.9,-35.2 10.1,-35 13.3,-35 13.4,-35 15.1,-33.3 15.3,-33.1 17.7,-33.1 17.9,-33.1 21.2,-29.8 22.1,-28.9 23.8,-28.9 23.8,-27.8 31.7,-19.9 32.1,-19.5 32.1,-17.3 34.4,-15 34.6,-14.8 34.6,-11.6 34.7,-11.6 36.1,-10.2 36.1,-5.4 37.2,-4.3 36.6,-3.7 36.6,8 36.6,8.7 35.1,10.2 34.9,10.4 34.9,13.6 34.9,14.1 32.7,16.3 32.4,16.6 32.4,18.8 32.4,19.2 25.5,26.1 19.6,32 17.7,32 15.6,34.1 12.9,34.1 12.7,34.1 11,35.8 10.8,36 6.3,36 6,36 4.9,37.1 4.3,36.5 -8.4,36.5 -9,36.5 -10.6,34.9 -10.7,34.8 -13.9,34.8 -14.5,34.8 -17,32.3 -17.2,32.1 -19.4,32.1 -19.4,32 -32,19.4 -32.1,19.3 -32.1,17.6 -32.1,17.5 -34.3,15.3 -34.8,14.8 -34.8,11 -34.8,10.7 -36.3,9.2 -36.3,7.3 -36.5,7.3 -36.8,7
+1.8V on Bottom Layer "Top Layer-No Net" (solid, remove dead copper, pour order 1004): -4,-5 -2,-5 -1.5,-5.5 -1.5,-8.5 -2,-9 -12,-19 -12,-21 -12.5,-21.5 -13.5,-21.5 -15.5,-19.5 -15.5,-17 -15.5,-16.5 -4,-5

## Other copper
Top Layer:
  rectangle net +1.8V: -13.45,-20 -11.9,-19.325
  region net GND: -16.775,-20.5 -16.5,-20.225 -14.775,-20.225 -13.75,-21.25 -13.75,-22.75 -14.75,-23.75 -16.525,-23.75 -16.775,-23.5
  region net GND: -9.35,-11.05 -9.35,-15.125 -8.475,-16 -8.475,-17.625 -7.925,-17.625 -5.6,-15.3 -5.6,-14.8 -7.85,-12.55 -7.85,-11.05
  region net GND: 0.45,-17.3 0.825,-16.925 0.825,-16.325 1.2,-15.95 3.65,-15.95 4.1,-16.4 4.1,-17.1 3.9,-17.3
  region net +5V: 1.15,-19.2 1.15,-19.85 -0.05,-21.05 -2.5,-21.05 -2.5,-23.2 -2.25,-23.45 -0.95,-23.45 2.75,-19.75 2.75,-19.45 2.7,-19.2
  region net +5V: -5,-15.05 -3.3,-15.05 -1.4,-16.95 -1.4,-17.2 -1.55,-17.35 -2.8,-17.35 -2.8,-17.3 -3.575,-16.525 -5,-16.525
  region net GND: -5.825,-17.2 -5.825,-16.775 -5.6,-16.55 -5.6,-15.3 -6.15,-15.3 -8.05,-17.2
  region net GND: -9.3,-19.375 -9.6,-19.075 -9.7,-19.075 -9.7,-18.525 -9.375,-18.525 -8.05,-17.2 -6.9,-17.2 -6.9,-18.175 -7.675,-18.175 -8.325,-18.825 -8.325,-19.55 -7.325,-20.55 -6.9,-20.55 -6.9,-22.05 -7.3,-22.05 -8,-22.75 -8.05,-22.7 -9.3,-22.7
  region net +1.8V: -13,-21.275 -13,-20.325 -13.3,-20.025 -13.3,-19.475 -11.85,-19.475 -11.85,-21.125 -11.7,-21.275
  region net +5V: -11.15,-19.475 -11.2,-19.525 -11.2,-21.25 -9.925,-21.25 -9.925,-20.25 -9.7,-20.025 -9.7,-19.475
  region net GND: -10,-23.4 -9.3,-22.7 -8.05,-22.7 -8,-22.75 -9.15,-23.9 -9.5,-23.9
  region net +5V: -11.2,-22.75 -11.2,-23.05 -11.65,-23.5 -13.225,-23.5 -13.5,-23.775 -13.5,-24.5 -13.25,-24.75 -10.75,-24.75 -10.5,-24.5 -10.5,-23.35 -9.9,-22.75
  region net +5V: -5,-20.55 -3,-20.55 -2.5,-21.05 -2.5,-23.3 -2.7,-23.5 -3.125,-23.5 -3.625,-23 -5.2,-23 -6.1,-23.9 -7.75,-23.9 -7.75,-23.325 -6.8,-22.375 -5.5,-22.375 -5,-21.875
  region net GND: 4,-16.3 3.2,-17.3 3.475,-17.575 4.2,-17.575 4.475,-17.85 6,-17.85 6,-17.1 5.975,-16.475 5.8,-16.3
  region net NetL302_1: 3.2,-17.8 4,-17.8 4.5,-18.3 5.5,-18.3 5.5,-21 3.7,-21 3.2,-20.5
  region net VLX_LED: 1.875,-22.125 2.5,-21.5 5,-21.5 5.5,-22 5.5,-24.5 4.5,-25.5 4.5,-28 4,-28.5 1.5,-28.5 1,-28 1,-24.95 1.875,-24.075
  region net +5V: -5,-15.05 -5,-14.8 -7.1,-12.7 -7.1,-11.5 -6.7,-11.1 -4.4,-11.1 -4.1,-11.4 -4.1,-14 -4,-14.1 -4,-14.7 -3.7,-15 -3.7,-15.1 -4.95,-15.1
  region net +5V: -11.3,-18.2 -9.6,-18.2 -9.2,-17.8 -9.2,-17.4 -11.275,-17.4 -11.3,-17.425
  region: 0,33 -1,32 1,32
  text "AV" at -3,30.25 h2
  text "1" at 8.75,25.25 h1.52
  text "AR" at -3,-31.5 h2
MidLayer1:
  region net +3.3V: 6.5,-13.5 4.5,-11.5 1,-11.5 1,-13.5 2.895,-15.395 5.1,-15.4 6,-16 6,-14
  region net +5V: -3.5,-20 -2.5,-21 -0.4,-21 1.225,-19.45 2.75,-19.45 3.1,-19.8 3.1,-20.5 0.8,-22.8 -3.1,-22.8 -4.9,-21 -4.9,-18.8 -5.2,-18.5 -3.5,-18.5
  text "2" at 10.5,25.2 h1.52
MidLayer2:
  text "3" at 12.575,25.175 h1.52
Bottom Layer:
  region: 0,33 -1,32 1,32
  text "AVANT" at 6.75,30.25 h2
  text "PIC In-situ" at 1.75,25.5 h2
  text "4" at 14.425,25.2 h1.52
  text "CAN" at -10.75,-10 h2
  text "CPLD In-situ" at 10.75,-12.75 h2
  text "LED Vision" at 8,-24 h2
  text "ARRIERE" at -0.25,-31.5 h2

## Silkscreen, mask and mechanical layers (free items; w line width, h text height)
Top Overlay:
  lines w0.254: -55,-3 -20.25,-3 ; -54.25,-12.5 -31.75,-12.5 -28.5,-9.25 -19.25,-9.25 ; -49.004,2.496 -36.622,2.496 -33.376,-0.75 -30.5,-0.75 ; -44.25,-35 -26.25,-35 -14.25,-23 -4,-23 -3.5,-23 ; -29,-31 -29,-24 -26,-21 -11,-21 -10.5,-21 -8.5,-21 -7.2,-19.7 -7.2,-15.15 ; -23.75,2.25 -19,2.25 -18,3.25 -18,6.75 ; -5.25,-8.5 -5.25,-10.75 -0.5,-15.5 ; -2.25,17.75 5,17.75 5.25,18 5.25,23.25 5.75,23.75 18,23.75 ; 0,-46 0,-19 ; 1.5,-14.5 13.5,-14.5 31.25,-32.25 56.25,-32.25 ; 3.486,-21.454 18.25,-21.454 ; 4.5,-2.25 4.5,-8.5 4.648,-8.648 17.398,-8.648 18.39,-9.64 18.39,-15.39 20.25,-17.25 44.75,-17.25 45.25,-17.75 45.25,-25 ; 5.4,-45.75 5.4,-25.6